# Altium PCB VRef_MEZ_0603.PcbDoc
Units mm, origin at the board's own origin, x right, y up, seen from the top; angles counter-clockwise.
Board outline 59 x 38 mm, 2 copper layers (Top Layer, Bottom Layer); 53 components, 25 nets, 158 pads, 36 vias.
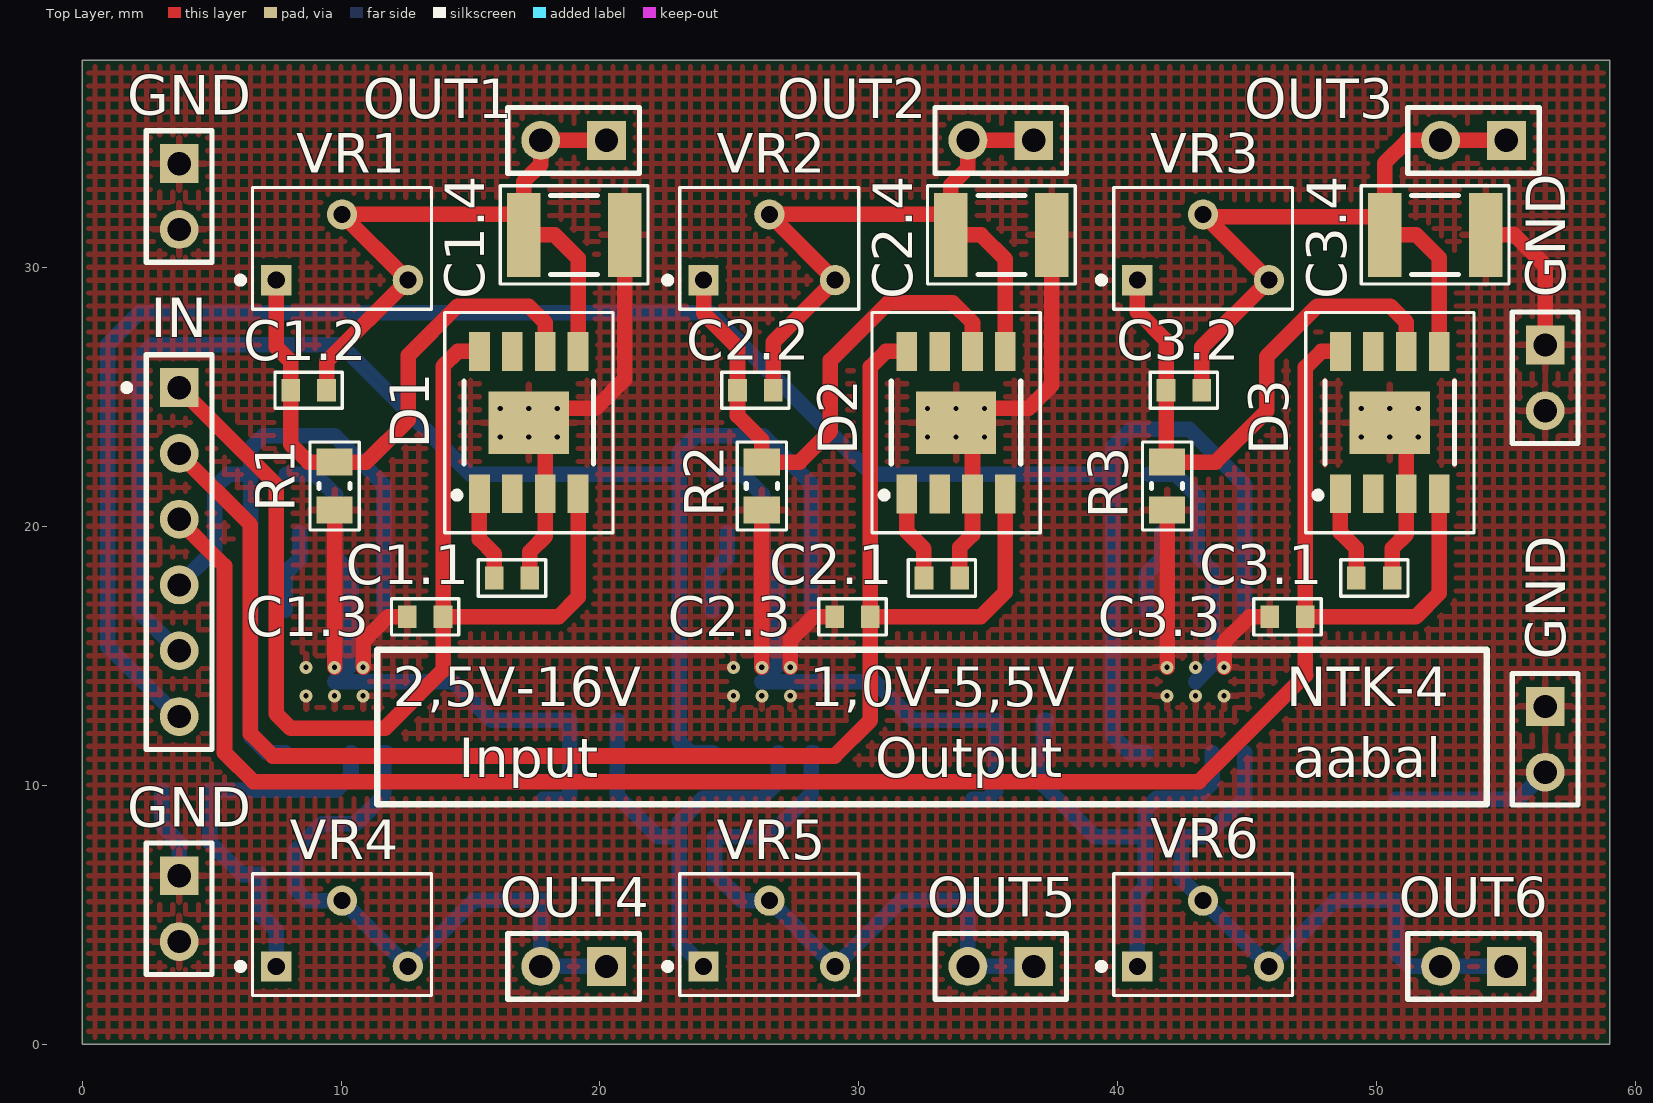
[diagram p0: Top Layer view]
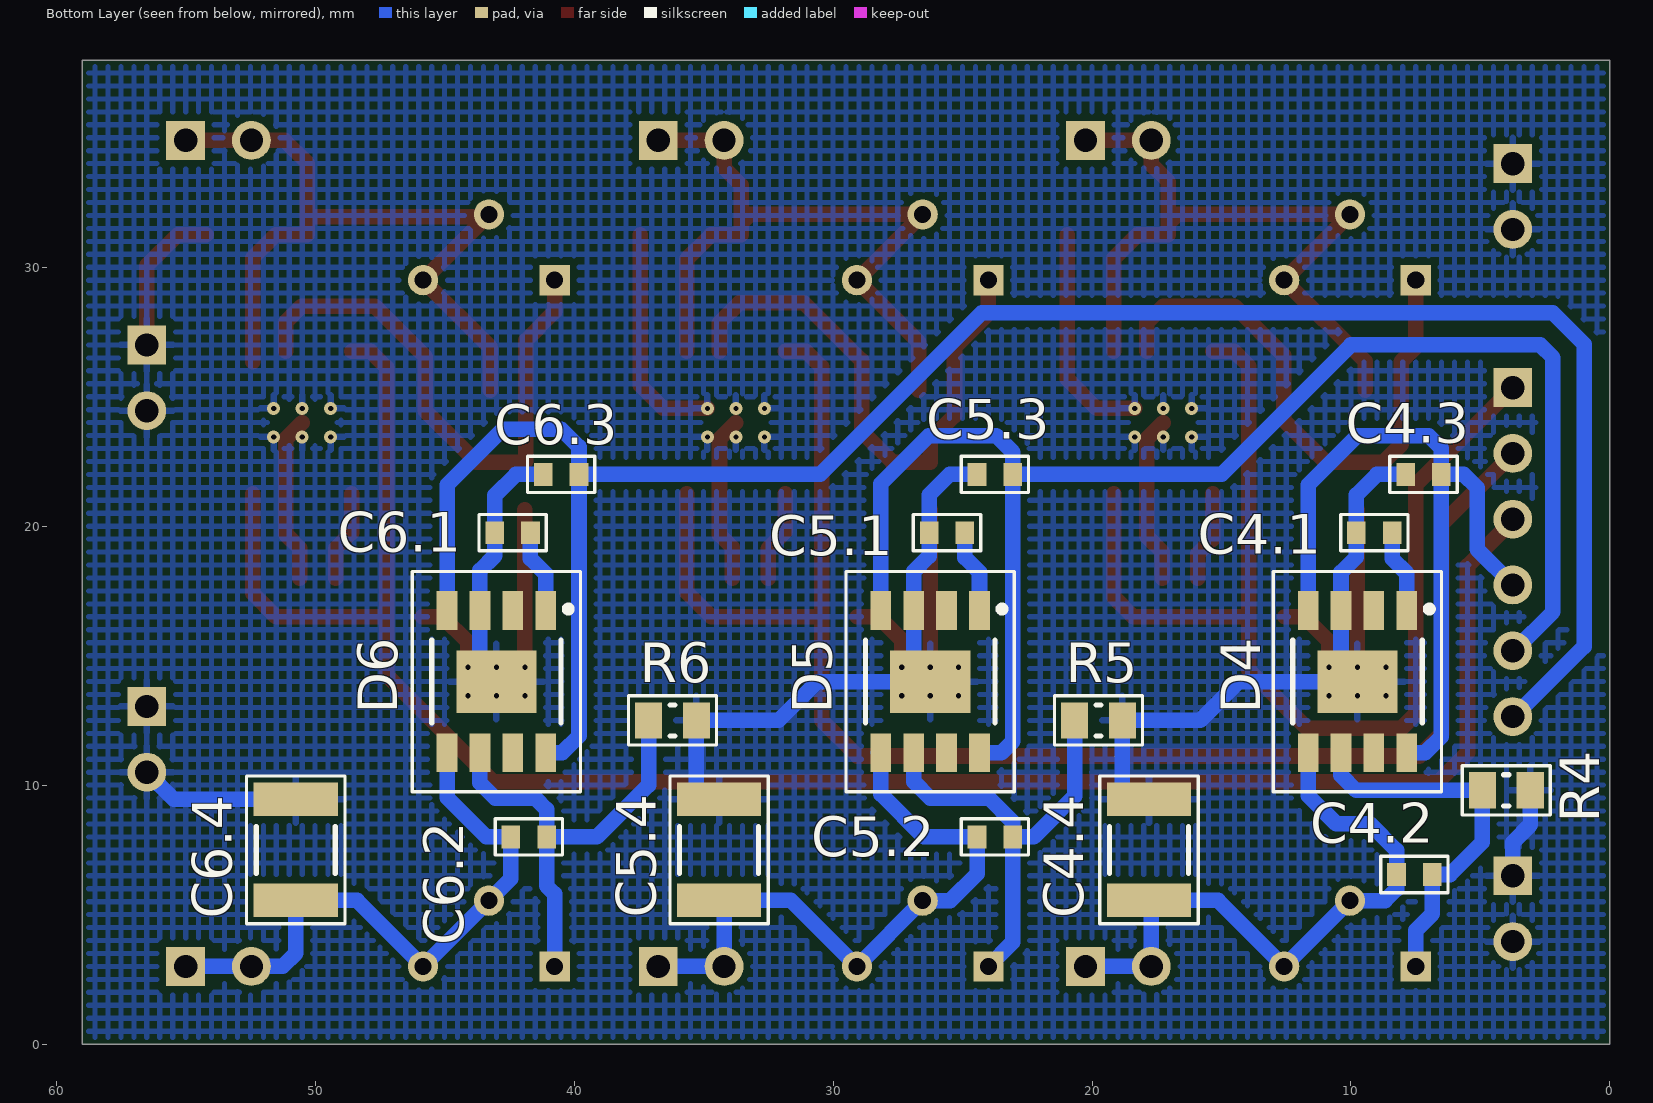
[diagram p1: Bottom Layer view, seen from below]

## Layer stack, top to bottom
Top Solder: solder mask 0.0102, Solder Resist, Dk 3.5
Top Layer: signal copper 0.0356
Dielectric 1: dielectric 0.32, FR-4, Dk 4.8
Bottom Layer: signal copper 0.0356
Bottom Solder: solder mask 0.0102, Solder Resist, Dk 3.5

## Board outline
0,0 59,0 59,38 0,38

## Design rules (kind name [scope] priority, off if disabled: settings)
Clearance [All] p1: gap=0.254 ignorepadtopadclearanceinfootprint=FALSE except(0: Arc-Hole Track-Hole SMDPad-Hole THPad-Hole Via-Hole Fill-Hole Poly-Hole Region-Hole Text-Hole)
PolygonConnect [All] p1: connectstyle=Relief reliefconductorwidth=0.254 reliefentries=4 polygonreliefangle="90 Angle" airgapwidth=0.254
RoutingVias [All] p1: holewidth=0.711 width=1.27 viastyle="Through Hole" minholewidth=0.711 minwidth=1.27 maxholewidth=0.711 maxwidth=1.27
SolderMaskExpansion [All] p1: expansion=0.102
Width [All] p1: maxlimit=0.6 minlimit=0.254 preferedwidth=0.254
30 further rules are at their usual default settings.

## Classes and differential pairs
component class VRef_MEZ: C1.1 C1.2 C1.3 C1.4 C2.1 C2.2 C2.3 C2.4 C3.1 C3.2 C3.3 C3.4 C4.1 C4.2 C4.3 C4.4 C5.1 C5.2 C5.3 C5.4 C6.1 C6.2 C6.3 C6.4 D1 D2 D3 D4 D5 D6 GND IN OUT1 OUT2 OUT3 OUT4 OUT5 OUT6 R1 R2 R3 R4 R5 R6 VR2 VR3 VR4 VR5 VR6

## Components (designator, comment, footprint, x,y, rotation, side; value= is the part's Value field where it differs from the comment)
C1.1 "0,01uF" CAP_0603 16.6,18 r0 top
C1.2 "C_FF" CAP_0603 8.75,25.25 r180 top
C1.3 "4,7uF" CAP_0603 13.25,16.5 r0 top
C1.4 "10uF" CAP_1812#1 19,31.25 r0 top
C2.1 "0,01uF" CAP_0603 33.2,18 r0 top
C2.2 "C_FF" CAP_1812#2 26,25.25 r180 top
C2.3 "4,7uF" CAP_0603 29.75,16.5 r0 top
C2.4 "10uF" CAP_1812#1 35.5,31.25 r0 top
C3.1 "0,01uF" CAP_0603 49.9,18 r0 top
C3.2 "C_FF" CAP_0603 42.55,25.25 r180 top
C3.3 "4,7uF" CAP_0603 46.55,16.5 r0 top
C3.4 "10uF" CAP_1812#1 52.25,31.25 r0 top
C4.1 "0,01uF" CAP_0603 9.1,19.75 r0 bottom
C4.2 "C_FF" CAP_0603 7.55,6.55 r180 bottom
C4.3 "4,7uF" CAP_0603 7.2,22 r180 bottom
C4.4 "10uF" CAP_1812#1 17.8,7.5 r90 bottom
C5.1 "0,01uF" CAP_0603 25.6,19.75 r0 bottom
C5.2 "C_FF" CAP_0603 23.75,8 r180 bottom
C5.3 "4,7uF" CAP_0603 23.75,22 r180 bottom
C5.4 "10uF" CAP_1812#1 34.4,7.5 r90 bottom
C6.1 "0,01uF" CAP_0603 42.375,19.75 r0 bottom
C6.2 "C_FF" CAP_0603 41.75,8 r180 bottom
C6.3 "4,7uF" CAP_0603 40.5,22 r180 bottom
C6.4 "10uF" CAP_1812#1 50.75,7.5 r90 bottom
D1 "LP3878MR-ADJ/NOPB" LP3878MR-ADJ/NOPB 17.25,24 r90 top
D2 "LP3878MR-ADJ/NOPB" LP3878MR-ADJ/NOPB 33.75,24 r90 top
D3 "LP3878MR-ADJ/NOPB" LP3878MR-ADJ/NOPB 50.5,24 r90 top
D4 "LP3878MR-ADJ/NOPB" LP3878MR-ADJ/NOPB 9.75,14 r270 bottom
D5 "LP3878MR-ADJ/NOPB" LP3878MR-ADJ/NOPB 26.25,14 r270 bottom
D6 "LP3878MR-ADJ/NOPB" LP3878MR-ADJ/NOPB 43,14 r270 bottom
GND "Header 2" HDR1X2 56.5,13.04 r270 top
GND "Header 2" HDR1X2 56.5,27 r270 top
GND "Header 2" HDR1X2 3.75,34 r270 top
GND "Header 2" HDR1X2 3.75,6.5 r270 top
IN "Header 6" HDR1X6 3.75,25.35 r270 top
OUT1 "Header 2" HDR1X2 20.25,34.9 r180 top
OUT2 "Header 2" HDR1X2 36.75,34.9 r180 top
OUT3 "Header 2" HDR1X2 55,34.9 r180 top
OUT4 "Header 2" HDR1X2 20.25,3 r180 top
OUT5 "Header 2" HDR1X2 36.75,3 r180 top
OUT6 "Header 2" HDR1X2 55,3 r180 top
R1 "RES" RES_0805 9.75,21.55 r90 top
R2 "RES" RES_0805 26.25,21.55 r90 top
R3 "RES" RES_0805 41.9,21.55 r90 top
R4 "RES" RES_0805 4,9.8 r0 bottom
R5 "RES" RES_0805 19.75,12.5 r0 bottom
R6 "RES" RES_0805 36.2,12.5 r0 bottom
VR1 "RES 3266W" "RES 3266W" 7.5,29.5 r0 top
VR2 "RES 3266W" "RES 3266W" 24,29.5 r0 top
VR3 "RES 3266W" "RES 3266W" 40.75,29.5 r0 top
VR4 "RES 3266W" "RES 3266W" 7.5,3 r0 top (schematic designator VR4.1)
VR5 "RES 3266W" "RES 3266W" 24,3 r0 top
VR6 "RES 3266W" "RES 3266W" 40.75,3 r0 top

## Footprints (in the part's own frame and the unit in brackets; to place one, negate y for a bottom-side part, rotate by r counter-clockwise, add the part's x,y. Pads: shape width x height; smd on the part's side, far side on the other; paste and mask are expansions set on the pad)
CAP_0603 [mm]
  rect 0.72x0.88 smd: 1(-0.69,0) 2(0.69,0)
  silkscreen extent -1.3,-0.7 1.3,0.7, body extent -0.8,-0.4 0.8,0.4, height 0.9
CAP_1812#1 [mm]
  rect 1.3x3.25 smd: 1(-1.95,0) 2(1.95,0)
  silkscreen extent -2.85,-1.9 2.85,1.9, body extent -2.25,-1.6 2.25,1.6, height 2
CAP_1812#2 [mm]
  rect 0.72x0.88 smd: 1(-0.69,0) 2(0.69,0)
  silkscreen extent -1.3,-0.7 1.3,0.7, body extent -0.8,-0.4 0.8,0.4, height 0.9
HDR1X2 [mm] "Connector; Header; 2 Position"
  rect 1.5x1.5 hole 0.9: 1(0,0)
  round 1.5 hole 0.9: 2(2.54,0)
  silkscreen extent -1.27,-1.27 3.81,1.27
HDR1X6 [mm] "Connector; Header; 6 Position"
  rect 1.5x1.5 hole 0.9: 1(0,0)
  round 1.5 hole 0.9: 2(2.54,0) 3(5.08,0) 4(7.62,0) 5(10.16,0) 6(12.7,0)
  silkscreen extent -1.27,-1.27 13.97,1.27
LP3878MR-ADJ/NOPB [mm] "SOIC, 8-Leads, Body 4,90x3,90mm, Pitch 1,27mm, Thermal Pad 3,10x2,41mm, IPC Medium Density"
  rect 1.5x0.8 smd: 1(-2.75,1.905) 2(-2.75,0.635) 3(-2.75,-0.635) 4(-2.75,-1.905) 5(2.75,-1.905) 6(2.75,-0.635) 7(2.75,0.635) 8(2.75,1.905)
  rect 2.41x3.1 smd: 9(0,0)
  silkscreen extent -4.25,-3.25 4.25,3.25, body extent -2,-2.5 2,2.5, height 1.68
"RES 3266W" [mm]
  rect 1.168x1.168 hole 0.66: 1(0,0)
  round 1.168 hole 0.66: 2(2.54,2.54) 3(5.08,0)
  silkscreen extent -1.48,-1.12 5.99,3.58, body extent -0.81,-1.02 5.9,3.48, height 8.77
RES_0805 [mm]
  rect 1.05x1.4 smd: 1(-0.925,0) 2(0.925,0)
  silkscreen extent -1.7,-0.95 1.7,0.95, body extent -1.1,-0.7 1.1,0.7, height 1

## Part data
C1.1 C1.2 C1.3 C1.4 C2.1 C2.2 C2.3 C2.4 C3.1 C3.2 C3.3 C3.4 C4.1 C4.2 C4.3 C4.4 C5.1 C5.2 C5.3 C5.4 C6.1 C6.2 C6.3 C6.4: library part CAP
GND GND GND GND OUT1 OUT2 OUT3 OUT4 OUT5 OUT6: "Header, 2-Pin", LatestRevisionDate=17-Jul-2002, LatestRevisionNote="Re-released for DXP Platform.", Publisher="Altium Limited"
IN: "Header, 6-Pin", LatestRevisionDate=17-Jul-2002, LatestRevisionNote="Re-released for DXP Platform.", Publisher="Altium Limited"

## Via types
v1: diameter 0.5, hole 0.2, Top Layer to Bottom Layer, 36 vias

## Nets (pads, with @x,y where several pads share a name; then routed paths per layer and width w, separated by ;. In a path a pad name is that pad's centre, name@x,y a point inside that pad or via, vN(x,y) a via of type N, cw(c..) or ccw(c..) an arc to the next point about the centre after c; other vN are vias at no path point)
GND: C1.1.2 C1.3.1 C1.4.2 C2.1.2 C2.3.1 C2.4.2 C3.1.2 C3.3.1 C3.4.2 C4.1.2 C4.3.1 C4.4.2 C5.1.2 C5.3.1 C5.4.2 C6.1.2 C6.3.1 C6.4.2 D1.3 D1.9 D2.3 D2.9 D3.3 D3.9 D4.3 D4.9 D5.3 D5.9 D6.3 D6.9 GND.1 GND.2 R1.1 R2.1 R3.1 R4.1 R5.1 R6.1 | length 136.9
  Top Layer w0.6: v1(9.75,14.55) R1.1 ; v1(10.85,14.55) 10.85,15.549 11.801,16.5 C1.3.1 ; D1.9 17.885,23.365 D1.3 17.885,19.612 17.29,19.017 C1.1.2 ; v1(18.35,24.55) 19.826,24.55 20.95,25.675 C1.4.2 ; v1(26.25,14.55) R2.1 ; v1(27.35,14.55) 27.35,15.615 28.235,16.5 C2.3.1 ; D2.9 34.385,23.365 D2.3 34.385,19.679 33.89,19.183 C2.1.2 ; v1(34.85,24.55) 36.55,24.55 37.45,25.45 C2.4.2 ; v1(41.9,14.55) R3.1 ; v1(44.1,14.55) 44.1,15.525 45.075,16.5 C3.3.1 ; D3.9 51.135,23.365 D3.3 51.135,19.69 50.59,19.145 C3.1.2 ; C3.4.2 55.313,31.25 56.5,30.063 GND.1@56.5,27
  Bottom Layer w0.6: R4.1 3.075,8.473 3.75,7.798 GND.1@3.75,6.5 ; C4.3.1 9,22 9.79,21.21 C4.1.2 9.79,18.81 10.385,18.215 D4.3 10.385,14.635 D4.9 14.321,14 15.821,12.5 R5.1 18.825,9.575 18.7,9.45 C4.4.2 ; C5.3.1 25.5,22 26.29,21.21 C5.1.2 26.29,18.846 26.885,18.251 D5.3 26.885,14.635 D5.9 30.602,14 32.102,12.5 R6.1 35.275,9.775 34.95,9.45 C5.4.2 ; C6.3.1 42.25,22 43.065,21.185 C6.1.2 43.065,18.86 43.635,18.29 D6.3 43.635,14.635 D6.9 ; C6.4.2 55.45,9.45 GND.2@56.5,10.5
  other v1: 8.65,13.45 9.75,13.45 10.85,13.45 25.15,13.45 26.25,13.45 27.35,13.45 41.9,13.45 43,13.45 44.1,13.45 8.65,14.55 25.15,14.55 43,14.55 16.15,23.45 17.25,23.45 18.35,23.45 32.65,23.45 33.75,23.45 34.85,23.45 49.4,23.45 50.5,23.45 51.6,23.45 16.15,24.55 17.25,24.55 32.65,24.55 33.75,24.55 49.4,24.55 50.5,24.55 51.6,24.55
IN1: C1.3.2 D1.4 D1.8 IN.1 | length 44.7
  Top Layer w0.6: IN.1@3.7,25.35 IN.1 7.493,21.607 7.493,12.757 8.052,12.198 11.698,12.198 13.94,14.44 C1.3.2 ; D1.8 14.507,26.75 13.94,26.183 C1.3.2 ; D1.4 19.155,17.255 18.4,16.5 C1.3.2
IN2: C2.3.2 D2.4 D2.8 IN.2 | length 61.5
  Top Layer w0.6: IN.2 6.5,20.06 6.5,11.991 7.366,11.125 29.058,11.125 30.44,12.508 C2.3.2 ; D2.8 31.042,26.75 30.44,26.147 C2.3.2 ; D2.4 35.655,17.455 34.7,16.5 C2.3.2
IN3: C3.3.2 D3.4 D3.8 IN.3 | length 76.6
  Top Layer w0.6: IN.3@3.7,20.27 5.5,18.47 5.5,11.25 6.615,10.135 43.135,10.135 47.25,14.25 47.24,14.26 C3.3.2 ; D3.8 47.857,26.75 47.24,26.133 C3.3.2 ; D3.4 52.405,17.405 51.5,16.5 C3.3.2
IN4: C4.3.2 D4.4 D4.8 IN.4 | length 29.6
  Bottom Layer w0.6: IN.4 5.131,19.111 5.131,21.488 5.642,22 C4.3.2 ; D4.8 7.139,11.25 6.51,11.88 C4.3.2 ; D4.4 11.655,21.595 9.75,23.5 7,23.5 6.51,23.01 C4.3.2
IN5: C5.3.2 D5.4 D5.8 IN.5 | length 58.8
  Bottom Layer w0.6: IN.5 3.7,15.19 2.2,16.69 2.2,26.508 2.692,27 10,27 15,22 C5.3.2 ; D5.8 23.5,11.25 23.06,11.69 C5.3.2 ; D5.4 28.155,21.645 26.3,23.5 23.7,23.5 23.06,22.86 C5.3.2
IN6: C6.3.2 D6.4 D6.8 IN.6 | length 81.2
  Bottom Layer w0.6: IN.6@3.7,12.65 1,15.35 1,27.035 2.215,28.25 24.25,28.25 30.5,22 C6.3.2 ; D6.8 40.464,11.25 39.81,11.904 C6.3.2 ; D6.4 44.905,21.595 42.75,23.75 40.5,23.75 39.81,23.06 C6.3.2
NetC1.1_1: C1.1.1 D1.1 | length 3.5
  Top Layer w0.6: D1.1 15.345,19.504 15.91,18.939 C1.1.1
NetC1.2_2: C1.2.2 D1.6 R1.2 VR1.1 | length 22
  Top Layer w0.6: VR1.1 7.5,26.917 8.06,26.357 C1.2.2 8.06,23.157 8.742,22.475 R1.2 10.975,22.475 12.6,24.1 12.6,26.6 14.5,28.5 17.245,28.5 17.885,27.86 D1.6
NetC2.1_1: C2.1.1 D2.1 | length 3.5
  Top Layer w0.6: D2.1 31.845,19.793 32.51,19.128 C2.1.1
NetC2.2_2: C2.2.2 D2.6 R2.2 VR2.1 | length 21.7
  Top Layer w0.6: VR2.1 24,28.222 25.31,26.913 C2.2.2 25.31,24.271 26.25,23.331 R2.2 27.707,22.475 28.9,23.668 28.9,26.4 31.126,28.626 33.624,28.626 34.385,27.865 D2.6
NetC3.1_1: C3.1.1 D3.1 | length 3.5
  Top Layer w0.6: D3.1 48.595,19.756 49.21,19.141 C3.1.1
NetC3.2_2: C3.2.2 D3.6 R3.2 VR3.1 | length 21.9
  Top Layer w0.6: VR3.1 40.75,28.287 41.86,27.177 C3.2.2 41.86,22.515 R3.2 43.775,22.475 45.75,24.45 45.75,26.55 47.7,28.5 50.519,28.5 51.135,27.884 D3.6
NetC4.1_1: C4.1.1 D4.1 | length 3.2
  Bottom Layer w0.6: D4.1 7.845,18.183 8.41,18.748 C4.1.1
NetC4.2_2: C4.2.2 D4.6 R4.2 VR4.1 | length 14.8
  Bottom Layer w0.6: VR4.1 7.5,4.387 6.86,5.027 C4.2.2 6.175,6.55 4.925,7.8 R4.2 9.8,9.8 10.385,10.385 D4.6
NetC5.1_1: C5.1.1 D5.1 | length 3.2
  Bottom Layer w0.6: D5.1 24.345,18.224 24.91,18.789 C5.1.1
NetC5.2_2: C5.2.2 D5.6 R5.2 VR5.1 | length 17.5
  Bottom Layer w0.6: R5.2 20.675,9.575 22.25,8 C5.2.2 ; VR5.1 23.06,3.94 C5.2.2 ; D5.6 26.885,10.135 26.25,9.5 23.978,9.5 23.06,8.582 C5.2.2
NetC6.1_1: C6.1.1 D6.1 | length 3.2
  Bottom Layer w0.6: D6.1 41.095,18.159 41.685,18.749 C6.1.1
NetC6.2_2: C6.2.2 D6.6 R6.2 VR6.1 | length 17.7
  Bottom Layer w0.6: R6.2@37.25,12.5 R6.2 37.125,10 39.125,8 C6.2.2 ; VR6.1 40.75,5.8 41.06,6.11 C6.2.2 ; D6.6 43.635,10.085 43.05,9.5 41.5,9.5 41.06,9.06 C6.2.2
OUT1: C1.2.1 C1.4.1 D1.5 OUT1.1 OUT1.2 VR1.2 VR1.3 | length 28.6
  Top Layer w0.6: C1.2.1 9.44,26.36 VR1.3 VR1.2 16.71,32.04 C1.4.1@17.05,31.7 ; D1.5 19.155,30.35 18.255,31.25 C1.4.1 C1.4.1@17.05,31.7 ; OUT1.1@20,34.9 OUT1.2 17.71,33.966 17.05,33.306 C1.4.1@17.05,31.7
OUT2: C2.2.1 C2.4.1 D2.5 OUT2.1 OUT2.2 VR2.2 VR2.3 | length 28.5
  Top Layer w0.6: C2.2.1 26.69,27.11 VR2.3 VR2.2 33.21,32.04 C2.4.1@33.55,31.7 ; D2.5 35.655,30.309 34.714,31.25 C2.4.1 C2.4.1@33.55,31.7 ; OUT2.1 OUT2.2 34.21,33.829 33.55,33.169 C2.4.1@33.55,31.7
OUT3: C3.2.1 C3.4.1 D3.5 OUT3.1 OUT3.2 VR3.2 VR3.3 | length 30.2
  Top Layer w0.6: C3.2.1 43.24,26.91 VR3.3 VR3.2@43.38,31.95 ; VR3.2 VR3.2@43.38,31.95 ; D3.5@52.405,26.345 D3.5 52.405,30.374 51.529,31.25 C3.4.1 C3.4.1@50.3,31.95 ; OUT3.1 OUT3.2 51.181,34.9 50.3,34.019 C3.4.1@50.3,31.95 ; VR3.2@43.38,31.95 C3.4.1@50.3,31.95
OUT4: C4.2.1 C4.4.1 D4.5 OUT4.1 OUT4.2 VR4.2 VR4.3 | length 24.5
  Bottom Layer w0.6: D4.5@11.75,11.25 D4.5 11.655,9.598 10.566,8.509 9.271,8.509 8.24,7.478 C4.2.1 8.24,5.984 8.684,5.54 VR4.2 VR4.3 15.13,5.55 C4.4.1 17.71,5.46 OUT4.2 OUT4.1
OUT5: C5.2.1 C5.4.1 D5.5 OUT5.1 OUT5.2 VR5.2 VR5.3 | length 25.2
  Bottom Layer w0.6: D5.5@28.25,11.25 D5.5 28.155,9.655 26.5,8 C5.2.1 24.44,6.573 25.473,5.54 VR5.2 VR5.3 31.63,5.55 C5.4.1@34,5.55 ; C5.4.1 C5.4.1@34,5.55 ; OUT5.1 OUT5.2 34.21,5.34 C5.4.1@34,5.55
OUT6: C6.2.1 C6.4.1 D6.5 OUT6.1 OUT6.2 VR6.2 VR6.3 | length 23.7
  Bottom Layer w0.6: D6.5 44.905,9.523 43.382,8 C6.2.1 42.44,6.39 VR6.2 VR6.3 48.38,5.55 C6.4.1 50.75,3.504 51.254,3 OUT6.2 OUT6.1
pads on no net: D1.2 D1.7 D2.2 D2.7 D3.2 D3.7 D4.2 D4.7 D5.2 D5.7 D6.2 D6.7

## Polygon pours and split planes (outlines as drawn)
GND on Bottom Layer "GND_L02_P106" (hatched 90Degree grid 0.5 track 0.2, remove dead copper, pour order 106): 0.25,0.25 0.25,37.75 58.75,37.75 58.75,0.25
no net on Bottom Layer "NONET_L02_P094" (hatched 90Degree grid 0.4 track 0.2, remove dead copper, pour order 94): 0.25,0.25
GND on Bottom Layer "GND_L02_P066" (hatched 90Degree grid 0.6 track 0.2, remove dead copper, pour order 66): 0.25,37.75
GND on Bottom Layer "GND_L02_P064" (hatched 90Degree grid 0.6 track 0.2, remove dead copper, pour order 64): -1,36
GND on Bottom Layer "GND_L02_P062" (hatched 90Degree grid 0.6 track 0.2, remove dead copper, pour order 62): 0.25,37.75
GND on Bottom Layer "GND_L02_P026" (hatched 90Degree grid 0.6 track 0.2, remove dead copper, pour order 26): 0.25,35.75
GND on Bottom Layer "GND_L02_P006" (hatched 90Degree grid 0.6 track 0.2, remove dead copper, pour order 6): 0.25,2.25
GND on Bottom Layer "GND_L02_P002" (hatched 90Degree grid 0.6 track 0.2, remove dead copper, pour order 2): 1,35
GND on Top Layer "GND_L01_P108" (hatched 90Degree grid 0.5 track 0.2, remove dead copper, pour order 108): 0.25,0.25 0.25,37.75 58.75,37.75 58.75,0.25
GND on Top Layer "GND_L01_P046" (hatched 90Degree grid 0.6 track 0.2, remove dead copper, pour order 46): 0.5,37.75
GND on Top Layer "GND_L01_P032" (hatched 90Degree grid 0.6 track 0.2, remove dead copper, pour order 32): 59.75,35.75

## Other copper
Top Layer:
  pour cut-out: 31,22 31,17 34.5,17 35.25,17.75 35.25,22
  pour cut-out: 14.5,22 14.5,17 18,17 18.75,17.75 18.75,22
  pour cut-out: 47.75,22 47.75,17 51.5,17 52,17.5 52,22
Bottom Layer:
  pour cut-out: 44.6,17.6 44.6,21.35 42.85,23.1 40.6,23.1 40.35,22.85 40.35,17.6
  pour cut-out: 27.91,17.5 27.91,21.25 26.16,23 23.91,23 23.66,22.75 23.66,17.5
  pour cut-out: 11.25,17.5 11.25,21.25 9.5,23 7.25,23 7,22.75 7,17.5

## Silkscreen, mask and mechanical layers (free items; w line width, h text height)
Top Overlay:
  circle w0.3: c1.725,25.35 r0.1
  lines w0.254: 11.4,9.257 54.25,9.257 54.25,15.231 11.4,15.231 11.4,9.257
  text "2,5V-16V" at 12,13.05 h1.52
  text "1,0V-5,5V" at 28.088,13.05 h1.52
  text "NTK-4" at 46.5,13.05 h1.52
  text "Input" at 14.539,10.3 h1.52
  text "Output" at 30.627,10.3 h1.52
  text "aabal" at 46.754,10.3 h1.52
Mechanical 1:
  the board outline again, w0.254